# Altium PCB PCB1.PcbDoc
Units mil, origin at the board's own origin, x right, y up, seen from the top; angles counter-clockwise.
Board outline 5137.99 x 2720 mil, 2 copper layers (Top Layer, Bottom Layer); 60 components, 52 nets, 206 pads, 89 vias.
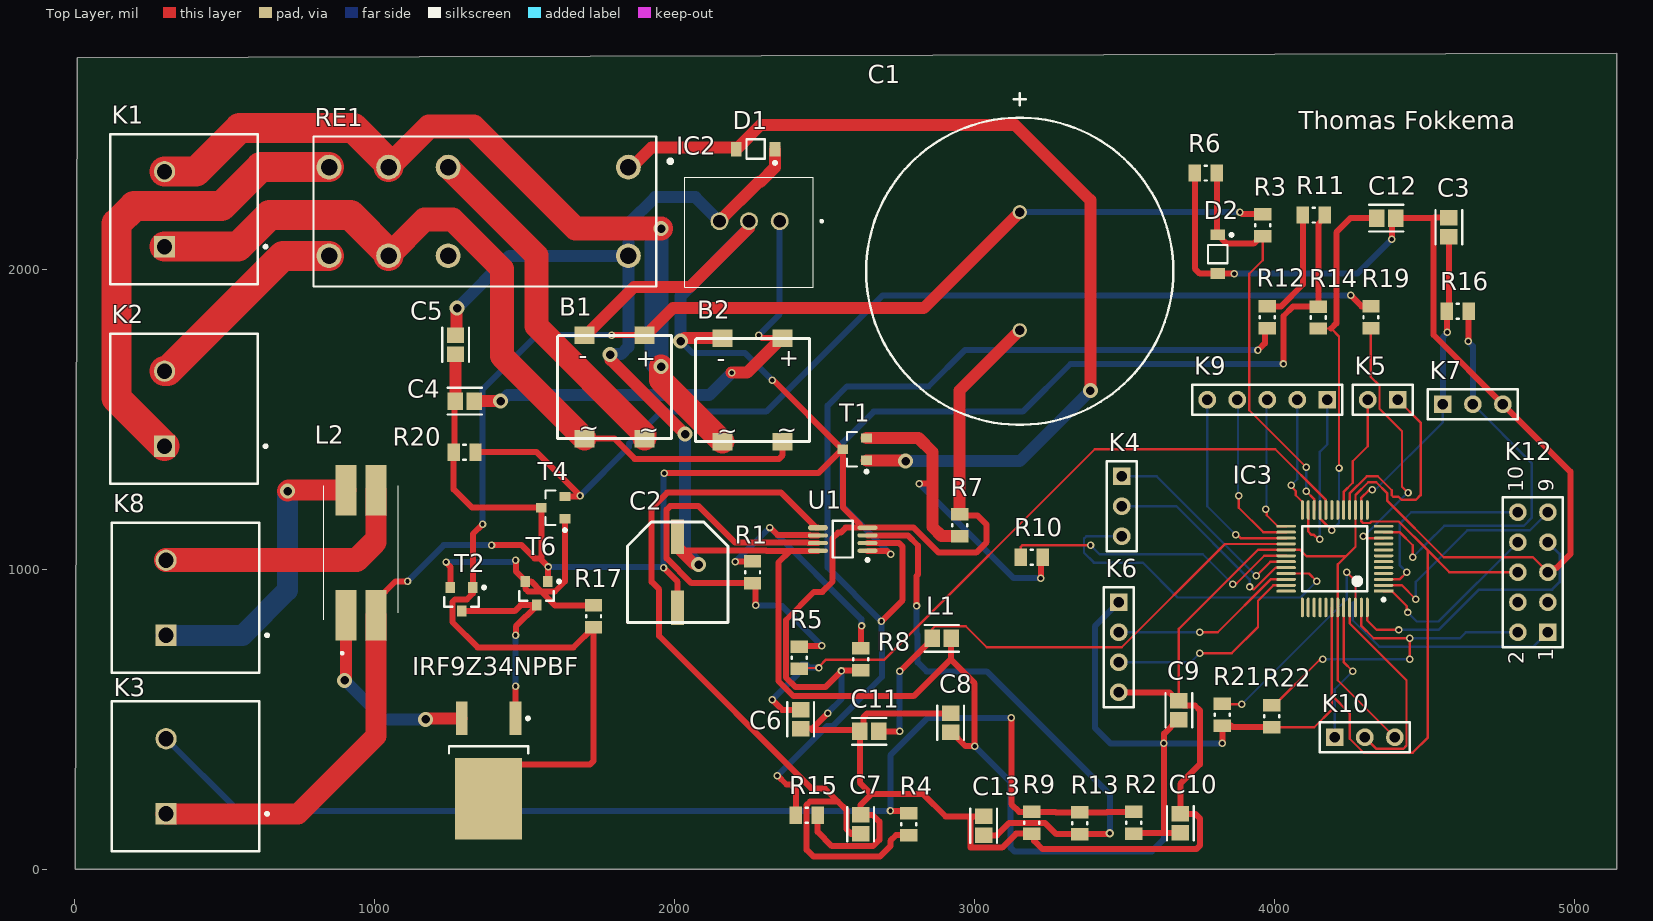
[diagram p0: Top Layer view]
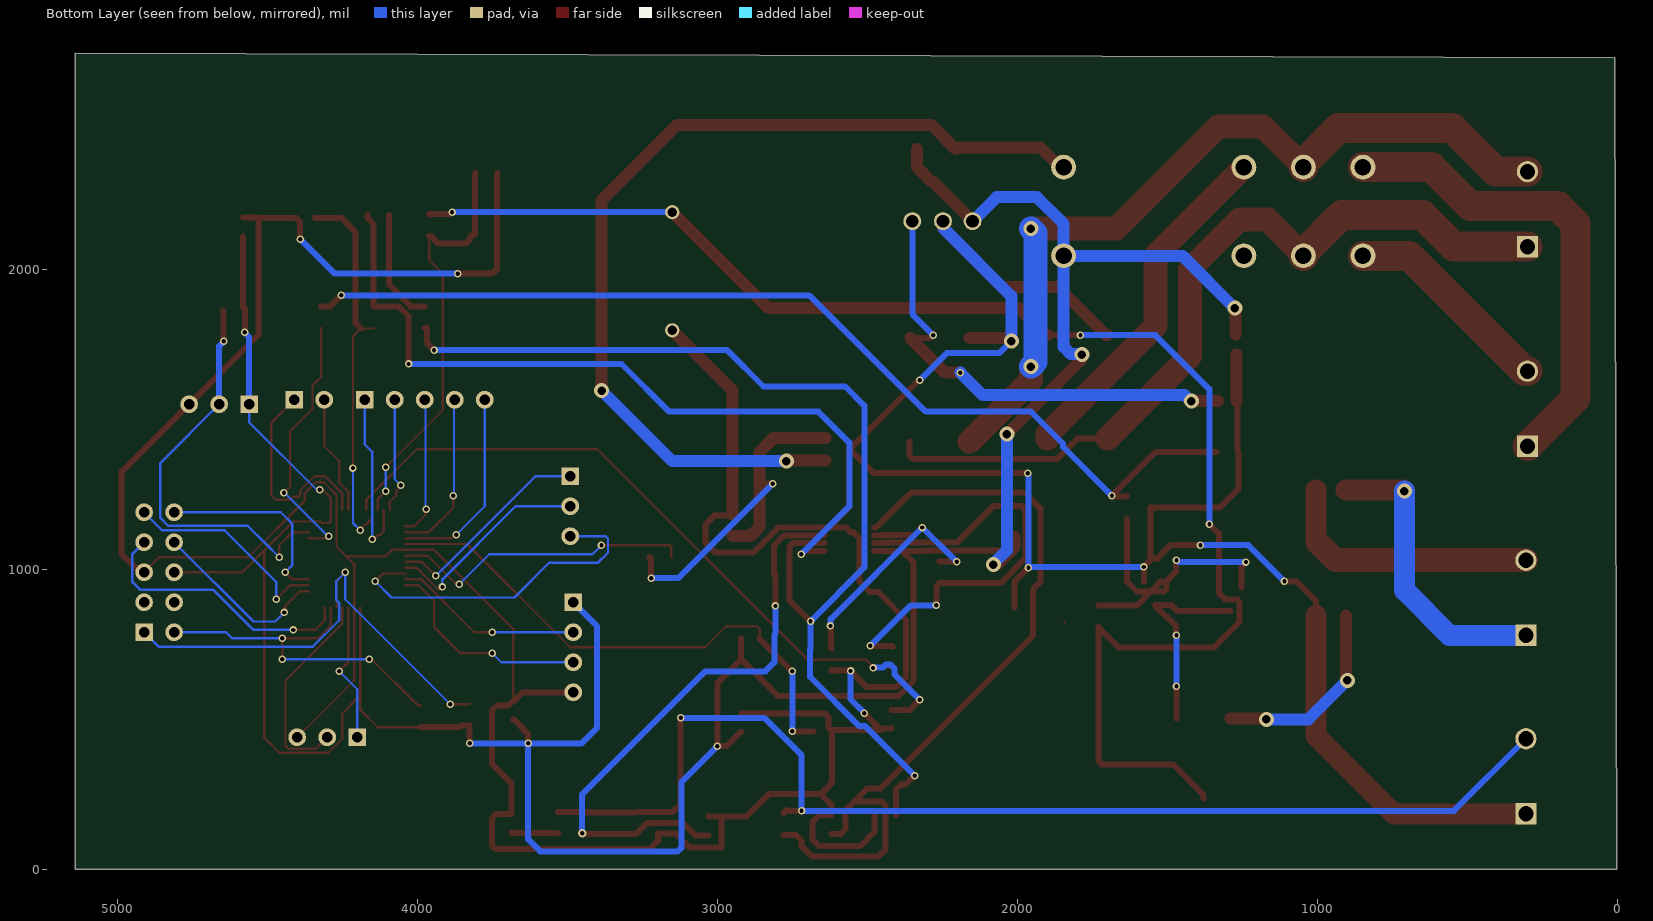
[diagram p1: Bottom Layer view, seen from below]

## Layer stack, top to bottom
Top Solder: solder mask 0.4, Solder Resist, Dk 3.5
Top Layer: signal copper 1.4
Dielectric 1: dielectric 12.6, FR-4, Dk 4.8
Bottom Layer: signal copper 1.4
Bottom Solder: solder mask 0.4, Solder Resist, Dk 3.5

## Board outline
2.01,0 5140,0 5140,2535 5140,2720 8.28,2705

## Design rules (kind name [scope] priority, off if disabled: settings)
Clearance [All] p1: gap=5 ignorepadtopadclearanceinfootprint=FALSE
MinimumSolderMaskSliver [All] p1: minsoldermaskwidth=6
PolygonConnect [All] p1: connectstyle=Relief reliefconductorwidth=10 reliefentries=4 polygonreliefangle="90 Angle" airgapwidth=10
RoutingVias [All] p1: holewidth=28 width=50 viastyle="Through Hole" minholewidth=14 minwidth=25 maxholewidth=28 maxwidth=50
SilkToSilkClearance [All] p1: silktosilkclearance=6
SilkToSolderMaskClearance [IsText] p1: minsilkscreentomaskgap=8 clearancetoexposedcopper=TRUE
SolderMaskExpansion [All] p1: expansion=4 istentingtop=FALSE
Width [All] p1: maxlimit=100 minlimit=8 preferedwidth=20
27 further rules are at their usual default settings.

## Classes and differential pairs
component class Voeding_bout: B1 B2 C1 C4 C5 D1 D2 IC2 K1 K2 R3 R6 RE1
component class thermokoppel: IRF9Z34NPBF K8 L2 R17 R20 T2 T4 T6
component class PWM_soldeerbout: C6 C7 C12 C13 K3 R1 R2 R4 R5 R8 R9 R11 R12 R13 R14 R15 U1
component class CPU: C2 C3 C8 C9 C10 C11 IC3 K4 K5 K6 K7 K9 K10 K12 L1 R7 R10 R16 R19 R21 R22 T1

## Components (designator, comment, footprint, x,y, rotation, side; value= is the part's Value field where it differs from the comment)
B1 "Bridge_Rectifier" ttf 1800,1605 r0 top
B2 "Bridge_Rectifier" ttf 2260,1595 r0 top
C1 "Capacitor" CE_D25_L25_plugin 3150,1796.3 r90 top
C2 "10µ , 50V" CE_D8_L10 2010,990 r90 top
C3 "100n" CC_0805_L 4580,2140 r90 top value="0.22 μF"
C4 "100uf" CC_0805_L 1300,1560 r180 top value="0.22 μF"
C5 "50uf" CC_0805_L 1270,1748.47 r270 top value="0.22 μF"
C6 "10nf" CC_0805_L 2420,500 r270 top value="0.22 μF"
C7 "10nf" CC_0805_L 2620,150 r90 top value="0.22 μF"
C8 "100n" CC_0805_L 2920,488.47 r90 top value="0.22 μF"
C9 "10µ, 50V" CC_0805_L 3680,530 r90 top value="0.22 μF"
C10 "100n" CC_0805_L 3685,153.47 r90 top value="0.22 μF"
C11 "100n" CC_0805_L 2648.47,460 r180 top value="0.22 μF"
C12 "10nf" CC_0805_L 4371.53,2170 r0 top value="0.22 μF"
C13 "10nf" CC_0805_L 3030,145 r90 top value="0.22 μF"
D1 "1N4007" SOD-123FL 2270,2400 r180 top value=15pF
D2 "Zener_Diode" SOD-123FL 3810,2050 r270 top
IC2 "OKI-78SR-5/1.5-W36-C" OKI78SR515W36C 2350,2160 r180 top
IC3 "ATMEGA4809" TQFP_48_M 4200,1035 r180 top
IRF9Z34NPBF "MOSFET_P" TO_252 1380,330 r270 top
K1 "O-Y" PHOE-1714955_V 300,2200 r90 top
K2 "R-B" PHOE-1714955_V 300,1535 r90 top
K3 "GND-T" PHOE-1714955_V 305,310 r90 top
K4 "Connector 3" HDR1X3 3490,1310 r270 top
K5 "Connector 2" HDR1X2 4410,1565 r180 top
K6 "Connector 4" HDR1X4 3480,890 r270 top
K7 "Connector 3" HDR1X3 4560,1550 r0 top
K8 "P-O" PHOE-1714955_V 305,905 r90 top
K9 "Connector 5" HDR1X5 4175,1565 r180 top
K10 "Connector 3" HDR1X3 4200,440 r0 top
K12 "Connecotr 10" HDR2X5 4910,790 r90 top
L1 "10µA" CC_0805_L 2890,770 r0 top
L2 "Common_Mode_Choke" 2545 955,1055 r0 top
R1 "18K" R_0805_M 2260,990 r90 top
R2 "1M" R_0805_M 3530,155 r270 top
R3 "68Kohm" R_0805_M 3960,2146.42 r270 top
R4 "5K6" R_0805_M 2780,150 r90 top
R5 "5K6" R_0805_M 2415,705 r90 top
R6 "10Kohm" R_0805_M 3770,2320 r0 top
R7 "4,7k" R_0805_M 2950,1146.42 r270 top
R8 "100E" R_0805_M 2620,700 r90 top
R9 "10M" R_0805_M 3190,155 r90 top
R10 "10k" R_0805_M 3190,1040 r0 top
R11 "18K" R_0805_M 4130,2180 r180 top
R12 "18K" R_0805_M 3975,1840 r270 top
R13 "5K6" R_0805_M 3350,153.58 r90 top
R14 "5K6" R_0805_M 4145,1838.58 r90 top
R15 "100E" R_0805_M 2440,180 r180 top
R16 "4,7k" R_0805_M 4610,1860 r180 top
R17 "4k7" R_0805_M 1730,843.58 r270 top
R19 "10K" R_0805_M 4320,1840 r270 top
R20 "4k7" R_0805_M 1300,1390 r0 top
R21 "4,7k" R_0805_M 3825,515 r270 top
R22 "4,7k" R_0805_M 3990,510 r270 top
RE1 "RELAY_GENERAL_PURPOSE" RT42 1845.79,2192.36 r180 top
T1 "Transistor_NPN" SOT_23 2600,1400 r180 top
T2 "BC547" SOT_23 1290,900 r270 top
T4 "BC547" SOT_23 1595,1205 r180 top
T6 "BC557" SOT_23 1540,920 r270 top
U1 "Dual_Opamp" MSOP_8_M 2560,1100 r180 top

## Footprints (in the part's own frame and the unit in brackets; to place one, negate y for a bottom-side part, rotate by r counter-clockwise, add the part's x,y. Pads: shape width x height; smd on the part's side, far side on the other; paste and mask are expansions set on the pad)
2545 [mm]
  rect 1.78x4.27 smd: 1(-1.27,-5.305) 2(1.27,-5.305) 3(1.27,5.305) 4(-1.27,5.305)
  silkscreen extent -3.15,-8.6 3.15,5.69, body extent -3.15,-7.26 3.15,7.26, height 9.6
CC_0805_L [mil]
  rect 51.36x57.33 smd paste+0 mask+0: 1(-31.53,0) 2(31.53,0)
  silkscreen extent -57,-44 57,44, body extent -67,-39 67,39, height 10
CE_D8_L10 [mm]
  rect 2.9x1.1 smd: 1(-3,0) 2(3,0)
  Top Layer lines w0.254: -4.259,4.25 -4.25,4.241
  silkscreen extent -4.26,-4.25 4.25,4.25
CE_D25_L25_plugin [mm]
  round 1.2 hole 0.8: 1(0,0) 2(10,0)
  silkscreen extent -8,-13 20.07,13
HDR1X2 [mm] "Connector; Header; 2 Position"
  rect 1.5x1.5 hole 0.9: 1(0,0)
  round 1.5 hole 0.9: 2(2.54,0)
  silkscreen extent -1.27,-1.27 3.81,1.27
HDR1X3 [mm] "Connector; Header; 3 Position"
  rect 1.5x1.5 hole 0.9: 1(0,0)
  round 1.5 hole 0.9: 2(2.54,0) 3(5.08,0)
  silkscreen extent -1.27,-1.27 6.35,1.27
HDR1X4 [mm] "Connector; Header; 4 Position"
  rect 1.5x1.5 hole 0.9: 1(0,0)
  round 1.5 hole 0.9: 2(2.54,0) 3(5.08,0) 4(7.62,0)
  silkscreen extent -1.27,-1.27 8.89,1.27
HDR1X5 [mm] "Connector; Header; 5 Position"
  rect 1.5x1.5 hole 0.9: 1(0,0)
  round 1.5 hole 0.9: 2(2.54,0) 3(5.08,0) 4(7.62,0) 5(10.16,0)
  silkscreen extent -1.27,-1.27 11.43,1.27
HDR2X5 [mm] "Connector; Header; 5x2 Position"
  rect 1.5x1.5 hole 0.9: 1(0,0)
  round 1.5 hole 0.9: 2(0,2.54) 3(2.54,0) 4(2.54,2.54) 5(5.08,0) 6(5.08,2.54) 7(7.62,0) 8(7.62,2.54) 9(10.16,0) 10(10.16,2.54)
  silkscreen extent -1.27,-1.27 11.43,3.81
MSOP_8_M [mm] "TSOP, 8-Leads, Body 3x3mm, Pitch 0.65mm, IPC Medium Density"
  oval 1.7x0.35 smd: 1(-2.1,0.975) 2(-2.1,0.325) 3(-2.1,-0.325) 4(-2.1,-0.975) 6(2.1,-0.325) 7(2.1,0.325) 8(2.1,0.975)
  oval 1.7x0.45 smd: 5(2.1,-0.975)
  silkscreen extent -2.22,-1.55 0.85,1.87, body extent -1.55,-1.55 1.55,1.55, height 1.1
OKI78SR515W36C [mm]
  round 1.519 hole 1.08: 1(0,0) 2(2.6,0) 3(5.1,0)
  silkscreen extent -3.6,-3.7 8.05,5.6, body extent -2.85,-3.7 8.05,5.6, height 16.6
PHOE-1714955_V [mm] "Terminal Block, 2-Leads, Body 12.7x12.5mm, Pitch 6.35mm"
  rect 1.8x1.8 hole 1.3: 1(-3.175,0)
  round 1.8 hole 1.3: 2(3.175,0)
  silkscreen extent -6.35,-8.68 6.35,4.6, body extent -6.92,-7.9 6.35,4.6, height 21.51
R_0805_M [mm] "Chip Resistor, 2-Leads, Body 2.00x1.25mm, IPC Medium Density"
  rect 1.05x1.45 smd: 1(-0.925,0) 2(0.925,0)
  silkscreen extent -0.1,-0.62 0.1,0.62, body extent -1.1,-0.72 1.1,0.72, height 0.5
RT42 [mm]
  round 2.1 hole 1.4: 11(20.3,3.75) 12(15.26,3.75) 14(25.34,3.75) 21(20.3,-3.75) 22(15.26,-3.75) 24(25.34,-3.75) A1(0,3.75) A2(0,-3.75)
  silkscreen extent -3.67,-6.35 26.65,6.35, body extent -2.21,-6.35 26.79,6.35, height 15.86
SOD-123FL [mm] "SOD, 2-Leads, Body 2.7x1.65mm"
  rect 0.91x1.22 smd: 1(-1.635,0) 2(1.635,0)
  silkscreen extent -1.76,-0.82 0.78,1.28, body extent -1.35,-0.82 1.35,0.82, height 1
SOT_23 [mm] "SOT23, 3-Leads, Body 2.92x1.3mm, Pitch 0.95mm"
  rect 0.9x0.8 smd: 1(-1,0.95) 2(-1,-0.95) 3(1,0)
  silkscreen extent -1.13,-1.46 0.65,2.02, body extent -0.65,-1.46 0.65,1.46, height 1.11
TO_252 [mm] "DPAK, 3-Leads, Body 6.5x6.12mm, Pitch 2.28mm, IPC Low Density"
  rect 2.85x1 smd: 1(-4.4,2.28) 3(-4.4,-2.28)
  rect 6.9x5.65 smd: 2(2.4,0)
  silkscreen extent -4.52,-3.35 -1.45,3.46, body extent -2.05,-3.32 4.17,3.32, height 2.35
TQFP_48_M [mm]
  rect 1.655x0.252 smd paste+0 mask+0: 1(-4.125,2.75)
  rrect100% 1.655x0.252 smd paste+0 mask+0: 2(-4.125,2.25) 3(-4.125,1.75) 4(-4.125,1.25) 5(-4.125,0.75) 6(-4.125,0.25) 7(-4.125,-0.25) 8(-4.125,-0.75) 9(-4.125,-1.25) 10(-4.125,-1.75) 11(-4.125,-2.25) 12(-4.125,-2.75) 25(4.125,-2.75) 26(4.125,-2.25) 27(4.125,-1.75) 28(4.125,-1.25) 29(4.125,-0.75) 30(4.125,-0.25) 31(4.125,0.25) 32(4.125,0.75) 33(4.125,1.25) 34(4.125,1.75) 35(4.125,2.25) 36(4.125,2.75)
  rrect100% 0.252x1.655 smd paste+0 mask+0: 13(-2.75,-4.125) 14(-2.25,-4.125) 15(-1.75,-4.125) 16(-1.25,-4.125) 17(-0.75,-4.125) 18(-0.25,-4.125) 19(0.25,-4.125) 20(0.75,-4.125) 21(1.25,-4.125) 22(1.75,-4.125) 23(2.25,-4.125) 24(2.75,-4.125) 37(2.75,4.125) 38(2.25,4.125) 39(1.75,4.125) 40(1.25,4.125) 41(0.75,4.125) 42(0.25,4.125) 43(-0.25,4.125) 44(-0.75,4.125) 45(-1.25,4.125) 46(-1.75,4.125) 47(-2.25,4.125) 48(-2.75,4.125)
  silkscreen extent -4.25,-2.75 2.75,3.58, body extent -5.2,-5.2 5.2,5.2, height 0.25
ttf [mm]
  rect 1.7x1.5 smd: 1(2.54,4.445) 2(-2.54,4.445) 3(-2.54,-4.318) 4(2.54,-4.318)
  silkscreen extent -4.83,-4.3 4.83,4.4

## Part data
B1 B2: Average Rectified Current-Max=0.8A, Forward Voltage=1V, Manufacturer="Diodes Inc", Package Description="4-Pin Small Outline Integrated Circuit, Body 4.7 x 3.8 mm, Pitch 2.5 mm", Package Reference=MiniDIP-4, Package Version=05/2016, Peak Current-Max=30A, Reverse Current-Max=5µA, Reverse Voltage-Max [Vrrm]=600V, Datasheet URL=http://www.diodes.com/_files/datasheets/ds17003.pdf, Datasheet Version="Rev. 13-2, 12/2010", Manufacturer URL=http://www.diodes.com/, Mounting Technology=SurfaceMount, Package URL=http://www.diodes.com/_files/packages/MiniDIP.pdf
C2: library part Capacitor_Electrolytic, Manufacturer=Panasonic, Max Operating Temperature="105 degC", Min Operating Temperature="-55 degC", Package Quantity=500, Voltage Rating="25 V", ComponentLink1Description="Manufacturer URL", ComponentLink1URL=http://www.panasonic.com/, ComponentLink2Description=Datasheet, ComponentLink2URL=http://industrial.panasonic.com/cdbs/www-data/pdf/RDE0000/ABA0000C1181.pdf, DatasheetVersion=03/2016, Height="10.2 mm", Lead Pitch="3.1 mm", Length="10.2 mm", Mount="Surface Mount", Mounting Technology="Surface Mount", PackageDescription="2-Pin Electrolytic Aluminum Capacitor, Body 8.3 x 8.3 mm", PackageReference=EEE-FK1E221P, Packaging="Tape and Reel", Pins=2, REACH SVHC="No SVHC", RoHSCompliant=true
C3 C4 C5 C6 C7 C8 C9 C10 C11 C12 C13: library part Capacitor_Ceramic, Capacitance="0.22 μF", Manufacturer=KEMET, Manufacturer Part Number=C0805C224K5RACTU, Package=C0805C-DN, Temperature="-55°C to +125°C", Temperature Characteristic=X7R, Temperature Coefficient=30ppm/°C, Temperature Range High=+125°C, Temperature Range Low=-55°C, Tolerance=0.1, Voltage Rating="50 V", Automotive=No, Category=Cap, ComponentLink2Description=Datasheet, ComponentLink2URL=https://content.kemet.com/datasheets/KEM_C1003_C0G_SMD.pdf, Device Class L1="Passive Components", Device Class L2=Capacitors, Device Class L3="Ceramic Capacitors", Digikey Description="CAP CER 0.22UF 50V X7R 0805", Height=0.88mm, Ipc Land Pattern Name=CAPC200125X78, Lead Free=Yes, Material=Ceramic, Mouser Description="CAP CER 0.22UF 50V X7R 0805", Octopart=https://octopart.com/c0805c224k5ractu-kemet-144670, RoHS=TRUE
D1: library part Diode, Capacitance=15pF, Forward Current=1A, Manufacturer=Diotec, Max Junction Temp=+175°C, Max Repetitive Reverse Voltage=1000V, Max Surge Forward Current=27A, Peak Reverse Current=5uA, Temperature="-50°C to +175°C", Temperature Range Low=-50°C, Automotive=No, Category=Diode, ComponentLink2Description=Datasheet, ComponentLink2URL=https://datasheet.octopart.com/1N4007-Diotec-datasheet-62346875.pdf, Device Class L1="Discrete Semiconductors", Device Class L2=Diodes, Device Class L3="Rectifier Diodes", Height=2.8mm, Ipc Land Pattern Name=DIOAD888W100L520D280, Lead Free=Yes, Manufacturer Part Number=1N4007, Octopart=https://octopart.com/1n4007-diotec-4040411, Package=1N4007, Reverse Voltage=1000V, RoHS=TRUE, Temperature Range High=+175°C
D2: Manufacturer="On Semiconductor", PartNumber=1SMB5920BT3G, ComponentLink1Description="Manufacturer URL", ComponentLink1URL=http://www.onsemi.com/, ComponentLink2Description=Datasheet, ComponentLink2URL=http://www.onsemi.com/pub_link/Collateral/1SMB5913BT3-D.PDF, ComponentLink3Description="Package Specification", ComponentLink3URL=http://www.onsemi.com/pub_link/Collateral/1SMB5913BT3-D.PDF, DatasheetVersion="Rev. 8", Mounting Technology="Surface Mount", PackageDescription="2-Pin Small Molded Package, J-Bend Lead, Body 4.33 x 3.625 mm", PackageReference=SMB-2-403A-03_H, PackageVersion="Rev. H, 05/2011", Packing="Tape and Reel", RoHS=Pb-Free, VZ Typ (V)=6.2
IC2: "Non-Isolated DC/DC Converter, 7.5 W, 7 to 36 V, 1.5 A, -40 to 85 degC, 3-Pin THD, RoHS", Current - Output (Max)=1.5A, Manufacturer=Murata, Operating Temperature=-40degC~85degC, Package / Case=3-SIPModule, Power (Watts) - Manufacture Series=8W, Voltage - Input (Max)=36V, Voltage - Input (Min)=7V, Voltage - Isolation=-, Voltage - Output 1=5V, Applications=ITE(Commercial), Category=PowerSupplies-BoardMount, Datasheet URL=https://datasheet.ciiva.com/8006/1790439-8006672.pdf, Datasheet Version=Oct-13, Efficiency=90.5%, Family=DCDCConverters, Features=SCP, Manufacturer URL=http://www.murata.com/, Mounting Type=ThroughHole, Number of Outputs=1, Packaging=Tube, Power (Watts) - Max=8W, Series=Okami™OKI-78SR, Size / Dimension="0.41\"Lx0.30\"Wx0.65\"H(10.4mmx7.6mmx16.5mm)", Type=LinearRegulatorReplacement, Voltage - Output 2=-, Voltage - Output 3=-
IC3: Case/Package=TQFP, Max Operating Temperature=85°C, Min Operating Temperature=-40°C, Core Architecture=AVR, Interface=I2C, Memory Size=48KB, Memory Type=FLASH, Mount="Surface Mount", Number of I/Os=41, Oscillator Type=Internal, Peripherals="Brown-out Detect/Reset", RoHS Compliant=Yes, Series="megaAVR® 0, Functional Safety (FuSa)"
IRF9Z34NPBF: Continuous Drain Current Id=2.4A, Current Temperature=25°C, Drain Source Voltage Vds=20V, Manufacturer="Fairchild Semiconductor", On Resistance Rds(on)=52mohm, Operating Temperature Max=150°C, Operating Temperature Min=-55°C, Operating Temperature Range=-55°Cto+150°C, Package / Case=SOT-23, Package Description="3-Pin Small Outline Transistor, Body 2.92 x 1.4 mm, Pitch 0.95 mm", Package Reference=SSOT3L, Package Version="Rev. 3, 05/2015", Power Dissipation Pd=500mW, Pulse Current Idm=10A, Rds(on) Test Voltage Vgs=-4.5V, Threshold Voltage Vgs Typ=-800mV, Voltage Vds Typ=-20V, Voltage Vgs th Max=-1.5V, Current Id Max=2.4A, Datasheet URL=https://www.fairchildsemi.com/datasheets/FD/FDN304P.pdf, Datasheet Version="Rev. C, 01/2001", External Depth=2.5mm, External Length / Height=1.12mm, External Width=3.05mm, Full Power Rating Temperature=25°C, Manufacturer URL=https://www.fairchildsemi.com/, Mounting Technology=SurfaceMount, No. of Pins=3, Package URL=https://www.fairchildsemi.com/package-drawings/MA/MA03B.pdf, Reel Quantity=3000, SMD Marking=304P, SVHC=NoSVHC(19-Dec-2012), Tape Width=8mm, Termination Type=SMD, Transistor Case Style=SOT-23, Transistor Polarity=PChannel, Voltage Vds=20V, Voltage Vgs Max=-800mV, Voltage Vgs Rds on Measurement=-4.5V
K1 K2 K3 K8: library part CMP-2000-05797-1, "PC Terminal Block, Pitch 6.35 mm, 1 x 2 Position, Height 21.5 mm, Tail Lenght 5.1 mm, RoHS, Bulk", Manufacturer="Phoenix Contact", Package Description="PC Terminal Block, Pitch 6.35 mm, 1 x 2 Position, Height 21.5 mm, Tail Lenght 5.1 mm", Package Reference=1714955, Datasheet URL=http://media.digikey.com/pdf/Data%20Sheets/Phoenix%20Contact%20PDFs/1714955.pdf, Datasheet Version=02/2010, Manufacturer URL=http://www.phoenixcontact.com/, Mounting Technology=ThroughHole
L1: library part Choke, Case/Package=1350, Current Rating=8.5A, DC Resistance (DCR)=14.1mR, Inductance=10uH, Inductance Tolerance=20%, Max Operating Temperature=155°C, Min Operating Temperature=-40°C, Package Quantity=1, Ratings=AEC-Q200, Resistor Type=Wirewound, Saturation Current=10A, Self Resonant Frequency=18MHz, Series Resistance=14.1R, Test Frequency=100kHz, Height=4.7mm, Height - Seated (Max)=0.197inch, Length=0.512inch, Max DC Current=8.5A, Mount="Surface Mount", Packaging="Tape and Reel", RMS Current (Irms)=8.5A, RoHS Compliant=Yes, Series=WE-HCI, Shielding=Shielded, Termination=SMD/SMT, Tolerance=20%, Width=12.8mm
L2: Case/Package=1808, Current=2A, Current Rating=2.3A, DC Resistance (DCR)=60mR, Insulation Resistance=10MR, Max Operating Temperature=85°C, Max Voltage Rating (DC)=50V, Min Operating Temperature=-40°C, Package Quantity=1, Test Frequency=100MHz, DC Current=2A, DC Resistance-Max=60mR, Depth=4.7mm, Element Configuration=Dual, Height=2mm, Impedance=900R, Lead Free="Lead Free", Length=0.185inch, Max Current Rating=2A, Max DC Current=2A, Mount="Surface Mount", Number of Lines=2, Number of Pins=4, Packaging="Tape and Reel", Radiation Hardening=No, REACH SVHC="No SVHC", RoHS Compliant=Yes, Series=ACM, Termination=Flat, Voltage Rating=50V, Voltage Rating (DC)=50V, Width=4.5mm
R1 R2 R3 R4 R5 R6 R7 R8 R9 R10 R11 R12 R13 R14 R15 R16 R17 R19 R20 R21 R22: library part Resistor, Manufacturer="Vishay Dale", Part Number=CRCW08050000Z0EA
RE1: Ambient Temperature Range High=+85°C, Ambient Temperature Range Low=-40°C, Coil Power=403mW, Coil Resistance=62Ω, Coil Voltage=5V, Current Rating=8A, Manufacturer="TE Connectivity", Manufacturer Part Number=RT424005, Automotive=No, Category=Relay, Coil Type=Non-Latching, ComponentLink2Description=Datasheet, ComponentLink2URL=https://www.te.com/commerce/DocumentDelivery/DDEController?Action=showdoc&DocId=Data+Sheet%7FRT2%7F1014%7Fpdf%7FEnglish%7FENG_DS_RT2_1014.pdf%7F5-1393243-9, Device Class L1=Electromechanical, Device Class L2=Relays, Device Class L3="Power Relays", Digikey Description="RELAY GENERAL PURPOSE DPDT 8A 5V", Height=15.7mm, Lead Free=Yes, Mouser Description="General Purpose Relay, Rt2 Series, Power, Non Latching, Dpdt, 5 Vdc, 8 A Rohs Compliant: Yes", Number Of Contacts=2, Octopart=https://octopart.com/5-1393243-9-te+connectivity-41835766, Package=RT424005, RoHS=TRUE, Throw Configuration=DPDT
T1: Manufacturer="On Semiconductor", PartNumber=BC547C, ComponentLink1Description="Manufacturer URL", ComponentLink1URL=http://www.onsemi.com/, ComponentLink2Description=Datasheet, ComponentLink2URL=http://www.onsemi.com/pub_link/Collateral/BC546-D.PDF, ComponentLink3Description="Package Specification", ComponentLink3URL=http://www.onsemi.cn/pub_link/Collateral/2N6426-D.PDF, DatasheetVersion="Rev. 7", fT Min (MHz)=150, IC Continuous (A)=0.1, Mounting Technology="Through Hole", PackageDescription="3-Pin Transistor Outline, Body 4.825 x 3.685 mm, Pitch 1.27 mm", PackageReference=TO-92-3-29-11_AM_SL, PackageVersion="Rev. AM", Packing="Bulk Box", Polarity=NPN, RoHS=FALSE
T2 T4: library part Transistor_NPN, Manufacturer="On Semiconductor", PartNumber=BC547C, ComponentLink1Description="Manufacturer URL", ComponentLink1URL=http://www.onsemi.com/, ComponentLink2Description=Datasheet, ComponentLink2URL=http://www.onsemi.com/pub_link/Collateral/BC546-D.PDF, ComponentLink3Description="Package Specification", ComponentLink3URL=http://www.onsemi.cn/pub_link/Collateral/2N6426-D.PDF, DatasheetVersion="Rev. 7", fT Min (MHz)=150, IC Continuous (A)=0.1, Mounting Technology="Through Hole", PackageDescription="3-Pin Transistor Outline, Body 4.825 x 3.685 mm, Pitch 1.27 mm", PackageReference=TO-92-3-29-11_AM_SL, PackageVersion="Rev. AM", Packing="Bulk Box", Polarity=NPN, RoHS=FALSE
T6: library part Transistor_PNP, Manufacturer="On Semiconductor", PartNumber=BC557C, ComponentLink1Description="Manufacturer URL", ComponentLink1URL=http://www.onsemi.com/, ComponentLink2Description=Datasheet, ComponentLink2URL=http://www.onsemi.com/pub_link/Collateral/BC556B-D.PDF, ComponentLink3Description="Package Specification", ComponentLink3URL=http://www.onsemi.cn/pub_link/Collateral/2N6426-D.PDF, DatasheetVersion="Rev. 3", IC Continuous (A)=-0.1, Mounting Technology="Through Hole", PackageDescription="3-Pin Transistor Outline, Body 4.825 x 3.685 mm, Pitch 1.27 mm", PackageReference=TO-92-3-29-11_AM_SL, PackageVersion="Rev. AM", Packing="Bulk Box", Polarity=PNP, RoHS=FALSE
U1: Case/Package=PDIP, Input Bias Current=1pA, Input Offset Voltage (Vos)=4.5mV, Max Operating Temperature=125°C, Max Supply Voltage=6V, Min Operating Temperature=-40°C, Min Supply Voltage=1.8V, Nominal Supply Current=100uA, Operating Supply Voltage=5.5V, Output Current=23mA, Package Quantity=60, Power Supply Rejection Ratio (PSRR)=86dB, Voltage Gain=112dB, Amplifier Type="GENERAL PURPOSE", Bandwidth=1MHz, Common Mode Rejection Ratio=60dB, Gain Bandwidth Product=1MHz, Height=3.3mm, Input Offset Voltage-Max=4.5mV, Lead Free="Lead Free", Length=9.27mm, Mount="Through Hole", Number of Amplifiers=2, Number of Channels=2, Number Of Circuits=2, Number of Elements=2, Number of Pins=8, Operating Supply Current=100uA, Output Current per Channel=23mA, Packaging=Rail/Tube, Radiation Hardening=No, REACH SVHC="No SVHC", RoHS Compliant=Yes, Slew Rate=0.6V/µs, Slew Rate-Nom=0.6V/µs, Supply Current=100uA, Technology=CMOS, Unity Gain Bandwidth Product=1MHz, Width=6.35mm

## Via types
v1: diameter 25, hole 14, Top Layer to Bottom Layer, 75 vias
v2: diameter 50, hole 28, Top Layer to Bottom Layer, 13 vias
v3: diameter 28, hole 14, Top Layer to Bottom Layer, 1 vias

## Nets (pads, with @x,y where several pads share a name; then routed paths per layer and width w, separated by ;. In a path a pad name is that pad's centre, name@x,y a point inside that pad or via, vN(x,y) a via of type N, cw(c..) or ccw(c..) an arc to the next point about the centre after c; other vN are vias at no path point)
4: B1.2 B2.2 C1.1 C2.1 C3.2 C4.2 C5.2 C6.2 C7.2 C8.2 C9.2 C10.2 C11.2 C12.2 C13.2 D2.2 IC2.2 IC3.15 IC3.29 IC3.43 K3.1 K6.4 K7.3 K10.3 K12.5 L2.2 R6.1 R7.1 R8.1 R9.1 R15.1 R20.1 T1.3 T4.3 T6.1 U1.4 | length 18013.1
  Top Layer w8: C9.2 3680,801.05 3943.95,1065 4081.76,1065 4082.23,1064.53 ; IC3.29 4082.23,1064.53 ; K10.3 4209.84,630.16 IC3.43 4209.84,1016 4237.28,1043.43 ; K12.5 4860,1040 4562.91,1040 4374.12,1228.79 4374.12,1253.88 4338,1290 4311.29,1290 4268.9,1247.61 4268.9,1075.06 4237.28,1043.43 ; 4082.23,1064.53 4084.99,1064.53 4106.09,1043.43 4237.28,1043.43
  Top Layer w20: L2.2 1005,895.16 1068.89,959.04 1109.04,959.04 v1(1110,960) ; C4.2@1269.24,1560.76 C4.2 1266.03,1557.55 1266.03,1392.45 R20.1 1263.58,1266.42 1325,1205 T4.3 1555.63,1031.92 1578.6,1008.95 v1(1578.6,1007.6) 1578,1007 1578,959.97 T6.1 ; C5.2@1269.24,1716.18 C5.2 ; v1(1390,1080) 1490,1080 1533.38,1036.62 1549.02,1036.62 ; v1(1963,1005) 2010,958 C2.1 ; v1(1965,1320) 2478.66,1320 T1.3@2558.66,1400 ; v1(2325,1630) 2325.96,1629.04 2329.62,1629.04 T1.3@2558.66,1400 ; C6.2 2458.47,468.47 v1@2509.04,519.04 ; 2458.47,464.24 2612.71,464.24 C11.2 ; R15.1 2476.42,124.58 2524,77 2661,77 2682,98 2682,159 2659.47,181.53 C7.2 2620,215 2655.5,250.5 ; R8.1 2618.38,661.96 2556.96,661.96 2503,608 2402,608 2371,639 2371,831 2464.5,924.5 2492,924.5 2526,958.5 2526,1103 2545.12,1122.12 2553.73,1122.12 2570,1138.39 U1.4@2618,1138.39 ; C8.2 2641.72,520 2630,508.28 2630,473.05 C11.2 ; R7.1 2953.1,1179.74 3008.54,1179.74 3040,1148.28 3040,1090 3005,1055 2880,1055 2796.61,1138.39 U1.4 U1.4@2618,1138.39 ; C13.2 2995.53,176.53 ; K6.4 3648.54,590 3677.02,561.53 C9.2 3695.68,545.84 3734.16,545.84 3750,530 3750,350 3685,285 C10.2 3735,185 3750,170 3750,78.72 3738.28,67 3226,67 3198,95 3198,118.58 R9.1 3138,118.58 3091.42,72 2986,72 2986,167 2995.53,176.53 ; R6.1 3733.58,2001.72 3750.3,1985 3809.37,1985 D2.2 3810.31,1985.31 3864.69,1985.31 v1(3865,1985) ; v1(4390,2100) 4390.96,2100.96 4390.96,2157.9 C12.2 4529,2170 ; C3.2 4530.53,2171.53 4529,2170 ; K12.5 4920.57,990 4935.16,1004.59 4939.59,1004.59 4985,1050 4985,1325 K7.3 4529,1781 4529,2170 ; T1.3@2558.66,1400 T1.3 2560.63,1206 2618,1148.63 U1.4@2618,1138.39 ; C11.2 2616.95,289.05 2655.5,250.5 ; 2655.5,250.5 2828.5,250.5 2902.47,176.53 2995.53,176.53
  Top Layer w40: C4.2@1269.24,1560.76 C5.2@1269.24,1716.18 ; B1.2 1703.94,1780 1863.94,1940 2050,1940 IC2.2@2246.93,2136.93 ; v2(2020,1760) 2022.71,1760 2032.71,1770 B2.2 ; R7.1 2950,1596.3 C1.1
  Top Layer w70: K3.1 745,185 1005,445 L2.2
  Bottom Layer w20: v1(1110,960) 1230,1080 v1(1390,1080) ; v1(1578.6,1007.6) 1959.05,1007.6 1961.65,1005 v1(1963,1005) 1963,1316.65 1965,1318.65 v1(1965,1320) ; v2(2020,1760) 2060,1720 2235,1720 v1(2325,1630) ; v1(2510,520) 2510,521.35 2556,567.35 v1(2556,661) ; v1(3865,1985) 4275,1985 v1(4390,2100)
  Bottom Layer w40: v2(2020,1760) 2020,1910 2243.85,2133.85 2243.85,2156.21 IC2.2
8: C2.2 C3.1 C5.1 C8.1 C9.1 C10.1 D1.1 IC2.3 IC3.14 IC3.42 K6.1 K7.1 K12.6 L1.2 R2.2 R16.2 R21.2 R22.2 RE1.A1 U1.8 | length 11165.7
  Top Layer w8: R22.2 4131.58,473.58 4190.16,532.16 4190.16,578.84 ; IC3.42 4190.16,578.84 ; v1(4325,1265) 4321.75,1261.75 4311.75,1261.75 4288.58,1238.58 4288.58,1159 4293.58,1154 4317,1154 4322,1159 4413,1159 4510,1062 ; K12.6 4582,990 4510,1062 ; 4190.16,578.84 4250,519 4250,435 4296.53,388.47 4459.48,388.47 4510,439 4510,1062
  Top Layer w20: C5.1 C5.1@1272.5,1782.5 ; v2@1272.5,1867.5 v2(1275,1870) ; C2.2@2019.68,1063 2304,1063 2305.39,1061.61 2384.61,1061.61 ; U1.8 2384.61,1061.61 ; C8.1 2922.98,456.95 2968.97,410.96 2999.04,410.96 v1(3000,410) 3000,620 2921.53,698.47 2921.53,702 ; L1.2 2921.53,702 ; R2.2 3531.68,120.26 3630,120.26 ; C9.1 3677.02,498.47 3630.96,452.41 3630.96,420.96 v1(3630,420) 3630,120.26 ; C10.1 3683.32,120.26 3630,120.26 ; v1(3825,420) R21.2 3854,478.58 3859,473.58 R22.2 ; v1(4575,1790) 4574.29,1790.71 4574.29,1859.29 R16.2 4573.58,1868 4580,1874.42 C3.1 ; 2384.61,1061.61 2346,1023 2346,627 2396,577 2796.53,577 2921.53,702
  Top Layer w40: C5.1@1272.5,1782.5 v2@1272.5,1867.5 ; v2(1785,1715) 1786.91,1713.09 1786.91,1698.09 v2(2035,1450) ; C2.2 2010,1072.68 2019.68,1063 2065.76,1016.91 2078.09,1016.91 v2(2080,1015) ; IC2.3 2279.21,2290 2285,2290 2334.37,2339.37 D1.1
  Bottom Layer w8: v1(4325,1265) 4326.75,1263.25 4333.25,1263.25 4560,1490 K7.1
  Bottom Layer w20: v1(3000,410) 3120,290 3120,71.72 3131.72,60 3590,60 3630,100 v1(3630,420) v1(3825,420) ; K6.1 3400,810 3400,471.72 3451.72,420 v1@3628.65,420 ; K7.1 4560,1773.65 4575,1788.65 v1(4575,1790)
  Bottom Layer w40: v2(1275,1870) 1449.72,2044.72 RE1.A1 ; v2(1785,1715) 1786.91,1716.91 1821.42,1716.91 1845.79,1741.28 RE1.A1 ; v2(2035,1450) 2035,1062.71 2080,1017.71 v2(2080,1015) ; IC2.3 2069.21,2240 1935,2240 1845.79,2150.79 RE1.A1
CPU/PD0: C6.1 IC3.20 R5.1 | length 2494.8
  Top Layer w8: R5.1 2417.42,671 v1(2481,671) 2481,675.6 2495.57,690.17 2495.57,690.92 2502.65,698 2698,698 3400,1400 4001.47,1400 4170.47,1231 IC3.20
  Top Layer w20: v1(2325,565) 2358.47,531.53 C6.1
  Bottom Layer w20: v1(2325,565) 2409.04,649.04 2409.04,669.04 2422,682 2438.57,682 2448.61,671.96 2480.04,671.96 v1(2481,671)
CPU/PD1: C12.1 IC3.21 R14.1 | length 1301.9
  Top Layer w8: R14.1 4188,1802.16 4214,1776.16 v1(4214,1337) ; IC3.21 4150.79,1169.51 4190,1130.3 v1(4190,1130)
  Top Layer w20: 4188,1802.16 4205,1819.16 4205,2123 4252,2170 C12.1
  Bottom Layer w8: v1(4190,1130) 4214,1154 v1(4214,1337)
CPU/PD2: D2.1 IC3.22 R3.2 R6.2 | length 1405.5
  Top Layer w8: R3.2 3960,2030 3915,1985 3915,1530 v1(4105,1340) ; v1(4105,1260) 4131.1,1233.9 IC3.22
  Top Layer w20: R6.2 3808.21,2318.21 3808.21,2116.16 D2.1 3816.1,2114.37 3824.02,2106.46 3824.02,2100.35 3839.37,2085 3929.74,2085 3941.46,2096.72 3941.46,2099.33 3952.13,2110 R3.2
  Bottom Layer w8: v1(4105,1260) v1(4105,1340)
CPU/R19: R19.1 R20.2 T4.2 | length 3393.4
  Top Layer w20: R20.2 1540,1390 v1(1685,1245) 1683.65,1245 1681.05,1242.4 T4.2 ; v1(4253,1913) 4289.58,1876.42 R19.1
  Bottom Layer w20: v1(1685,1245) 1847.66,1407.66 1847.66,1418.29 1954.37,1525 2305,1525 2693,1913 v1(4253,1913)
NetB1_3: B1.3 B2.4 K1.1 RE1.11 | length 2764.4
  Top Layer w20: B1.3 1800,1435 1867,1368 2348,1368 2360,1380 B2.4
  Top Layer w80: RE1.11 1166.85,2165 1260,2165 1425,2000 1425,1710 B1.3
  Top Layer w100: K1.1 545,2075 650,2180 920,2180 1046.57,2053.43 RE1.11
NetB1_4: B1.4 RE1.22 | length 1176.3
  Top Layer w80: RE1.22 1540,2045 1540,1810 1900,1450 B1.4
NetB2_1: B2.1 C4.1 IC2.1 | length 1604.7
  Top Layer w20: v1(2280,1780) 2281.35,1780 2291.35,1770 2356.06,1770 B2.1
  Top Layer w40: C4.1 v2(1420,1560) ; v1(2190,1655) 2241.06,1655 B2.1@2356.06,1770
  Bottom Layer w20: v1(2280,1780) 2350,1850 IC2.1
  Bottom Layer w40: v2(1420,1560) 1422.71,1560 1442.71,1580 2115,1580 v1(2190,1655)
NetB2_3: B2.3 K1.2 RE1.21 | length 2780.9
  Top Layer w80: RE1.21 1181.57,2475 1330,2475 1670,2135 v2(1955,2135) ; v2(1955,1675) 1955,1630 B2.3
  Top Layer w100: K1.2 405,2325 550,2470 930,2470 1046.57,2353.43 RE1.21
  Bottom Layer w80: v2(1955,1675) 1940,1690 1940,2120 v2(1955,2135)
NetC7_1: C7.1 R4.1 U1.5 | length 2689.9
  Top Layer w20: U1.5 2471.37,1138.39 2354.75,1255 1975,1255 1923.34,1203.34 1923.34,957.95 1948.34,932.95 1948.34,777.66 2457,269 2501,269 2544,226 ; C7.1 2588,118.47 2572,134.47 2572,198 2544,226 ; R4.1 2737.58,113.58 2719,95 2719,77 2684,42 2463,42 2440,65 2440,215 2451,226 2544,226
NetC11_1: C11.1 IC3.28 L1.1 | length 1810.9
  Top Layer w8: L1.1 2858.47,800.47 2868,810 2970,810 3040,740 3489.79,740 3834,1084.21 IC3.28
  Top Layer w20: C11.1 v1(2750,460) ; v1(2750,660) 2750.96,660.96 2752.41,660.96 2858.47,767.02 L1.1
  Bottom Layer w20: v1(2750,460) v1(2750,660)
NetC13_1: C13.1 R13.1 U1.3 | length 1982.1
  Top Layer w20: U1.3 2777.2,1112.8 2811,1079 2811,981.68 2806,976.68 v1(2806,878) ; C13.1 3073.47,113.47 3074,114 ; 3073.47,114.53 3074,114 ; v3(3450,120) 3447.84,120 3445,117.17 R13.1 3271.83,117.17 3234,155 3115,155 3074,114
  Bottom Layer w20: v1(2806,878) 2806,785.82 2810,781.82 2810,690 2840,660 3040,660 3450,250 v3(3450,120)
NetD1_2: D1.2 RE1.A2 T1.1 | length 3184.3
  Top Layer w40: RE1.A2 1857.34,2340 1922.34,2405 2200.63,2405 2201.61,2404.02 2203.54,2404.02 D1.2@2205.63,2401.93 ; D1.2 D1.2@2205.63,2401.93 ; T1.1 2684.7,1362.6 2685.38,1361.91 2768.09,1361.91 v2(2770,1360) ; v2(3385,1595) 3385,2230 3135,2480 2285.63,2480 2209.65,2404.02 2207.72,2404.02 D1.2@2205.63,2401.93
  Bottom Layer w40: v2(2770,1360) 3150,1360 v2(3385,1595)
NetIC3_1: IC3.1 K12.8 | length 609.1
  Top Layer w8: IC3.1 4390.03,926.73 4439.75,877.02 4439.75,859.25 v1(4443,856)
  Bottom Layer w8: v1(4443,856) 4473,826 4546,826 K12.8
NetIC3_2: IC3.2 K12.9 | length 720.9
  Top Layer w8: IC3.2 4423.58,946.42 v1(4470,900)
  Bottom Layer w8: v1(4470,900) 4470,958 4642,1130 4850,1130 K12.9
NetIC3_3: IC3.3 K12.10 | length 668.6
  Top Layer w8: IC3.3 4416.1,966.1 v1(4440,990)
  Bottom Layer w8: v1(4440,990) 4416,1014 4416,1151 4455,1190 K12.10
NetIC3_10: IC3.10 R19.2 | length 879.1
  Top Layer w8: v1(4295,1110) 4299.6,1110 4305.7,1103.9 IC3.10 ; R19.2 4320,1641 4349,1612 4349,1535 4424,1460 4424,1274.79 v1(4444,1254.79)
  Bottom Layer w8: v1(4295,1110) 4297.1,1110 4441.9,1254.79 v1(4444,1254.79)
NetIC3_11: IC3.11 K7.2 R16.1 | length 1382.9
  Top Layer w8: IC3.11 4362.79,1123.21 4391.78,1123.21 4392.04,1122.95 4417.05,1122.95 4460,1080 v1(4460,1040)
  Top Layer w20: v1(4645,1760) 4645.71,1760.71 4645.71,1859.29 R16.1
  Bottom Layer w8: v1(4460,1040) 4507.36,1087.36 4565,1145 4830,1145 4856,1171 4856,1354 K7.2
  Bottom Layer w20: v1(4645,1760) 4645,1758.65 4660,1743.65 K7.2
NetIC3_16: IC3.16 K5.1 | length 713.8
  Top Layer w8: IC3.16 4249.21,1252.21 4307,1310 4343,1310 4390,1263 4390,1246.79 4395,1241.79 4412.21,1241.79 4423,1231 4470,1231 4486,1247 4486,1489 K5.1
NetIC3_17: IC3.17 K5.2 | length 400.9
  Top Layer w8: IC3.17 4229.53,1257.53 4260,1288 4260,1360 4310,1410 K5.2
NetIC3_23: IC3.23 K9.1 | length 596.1
  Top Layer w8: IC3.23 4111.42,1126 4122.79,1114.63 4130.77,1114.63 4145.4,1100 v1(4150,1100)
  Bottom Layer w8: v1(4150,1100) 4150,1391 4175,1416 K9.1
NetIC3_24: IC3.24 K9.2 | length 394.6
  Top Layer w8: v1(4055,1280) 4055,1275.4 4070,1260.4 4070,1246.76 4091.73,1225.03 IC3.24
  Bottom Layer w8: v1(4055,1280) 4075,1300 K9.2 K9.2@4072.5,1562.5
NetIC3_25: IC3.25 K9.3 | length 468
  Top Layer w8: v1(3970,1200) 3973.25,1196.75 3973.25,1179.98 4009.97,1143.27 IC3.25
  Bottom Layer w8: v1(3970,1200) 3972.5,1202.5 3972.5,1562.5 K9.3
NetIC3_26: IC3.26 K9.4 | length 553.4
  Top Layer w8: v1(3880,1245) 3880,1205 3961.42,1123.58 IC3.26
  Bottom Layer w8: K9.4 3877.5,1562.5 3877.5,1247.5 v1(3880,1245)
NetIC3_27: IC3.27 K9.5 | length 661.5
  Top Layer w8: v1(3870,1115) 3874.6,1115 3885.7,1103.9 IC3.27
  Bottom Layer w8: K9.5 3775,1210 v1(3870,1115)
NetIC3_30: IC3.30 R10.1 | length 1014
  Top Layer w8: R10.1 3153.58,1074.58 3159,1080 v1(3386,1080) ; v1(3860,950) 3863.25,953.25 3873.25,953.25 3964.84,1044.84 IC3.30
  Bottom Layer w8: v1(3386,1080) 3416,1050 3760,1050 v1(3860,950)
NetIC3_31: IC3.31 K4.1 | length 704.2
  Top Layer w8: v1(3938,978) 3985.16,1025.16 IC3.31
  Bottom Layer w8: K4.1 3606,1310 v1@3937.73,978.27
NetIC3_32: IC3.32 K4.2 | length 706.8
  Top Layer w8: v1(3916,941) 3920.6,941 3928.35,933.25 3930.78,933.25 4002.63,1005.1 4037.21,1005.1 IC3.32
  Bottom Layer w8: K4.2 3672,1210 3916,966 v1(3916,941)
NetIC3_33: IC3.33 K4.3 | length 1149.5
  Top Layer w8: IC3.33 4114.21,985.79 v1(4140,960)
  Bottom Layer w8: K4.3 3372,1110 3364,1102 3364,1055 3397,1022 3560,1022 3676,906 4086,906 v1(4140,960)
NetIC3_34: IC3.34 K6.2 | length 630.5
  Top Layer w8: v1(3750,790) 3810,790 3986.1,966.1 IC3.34
  Bottom Layer w8: K6.2 v1(3750,790)
NetIC3_35: IC3.35 K6.3 | length 714.8
  Top Layer w8: v1(3750,720) 3856,720 3944,808 3944,895 3995.42,946.42 IC3.35
  Bottom Layer w8: K6.3 3720,690 v1(3750,720)
NetIC3_44: IC3.44 K10.1 | length 470.1
  Top Layer w8: IC3.44 4229.53,690.47 v1(4260,660)
  Bottom Layer w8: K10.1 4200,600 v1(4260,660)
NetIC3_45: IC3.45 K10.2 | length 698.2
  Top Layer w8: IC3.45 4249.21,819.98 4439,630.19 4439,412.47 4428,401.47 4338.53,401.47 K10.2
NetIC3_46: IC3.46 K12.1 R21.1 | length 1662.9
  Top Layer w8: R21.1 3826.42,550 v1(3890,550) ; v1(4240,990) 4268.9,961.1 IC3.46
  Bottom Layer w8: v1(3890,550) 4240,900 v1(4240,990) 4270,960 4270,897.7 4260,887.7 4260,830 4348,742 4862,742 K12.1
NetIC3_47: IC3.47 K12.2 R22.1 | length 1211.8
  Top Layer w8: R22.1 3997.87,546.42 4148.2,696.75 4156.75,696.75 v1(4160,700) ; IC3.47 4288.58,811.42 4330,770 v1(4450,770) v1(4450,700) ; K12.2@4799.79,790 K12.2
  Bottom Layer w8: v1(4160,700) v1(4450,700) ; v1(4450,770) 4617.02,770 4637.02,790 K12.2
NetIC3_48: IC3.48 K12.7 | length 911.7
  Top Layer w8: IC3.48 4308.27,829.73 4340,798 v1(4413,798)
  Bottom Layer w8: v1(4413,798) 4546,798 4680,932 4924,932 4949,957 4949,1051 K12.7
NetIRF9Z34NPBF_1: IRF9Z34NPBF.1 T2.3 T6.3 | length 664.8
  Top Layer w20: T2.3 1467,860.63 1487,880.63 T6.3 1540,878.66 1470.96,809.62 1470.96,780.96 v1(1470,780) ; IRF9Z34NPBF.1 1469.88,503.35 1469.88,609.88 v1(1470,610)
  Bottom Layer w20: v1(1470,610) v1(1470,780)
NetIRF9Z34NPBF_3: IRF9Z34NPBF.3 L2.1 | length 663.6
  Top Layer w40: v2(900,630) 905,635 L2.1 ; v2(1170,500) 1173.23,503.23 IRF9Z34NPBF.3
  Bottom Layer w40: v2(900,630) 1030,500 v2(1170,500)
NetK2_1: K2.1 RE1.24 | length 1594
  Top Layer w100: K2.1 140,1570 140,2151.42 198.58,2210 490,2210 620,2340 RE1.24
NetK2_2: K2.2 RE1.14 | length 707.5
  Top Layer w100: K2.2 310,1660 694.72,2044.72 RE1.14
NetK3_2: K3.2 R2.1 R4.2 R9.2 R13.2 | length 3927.8
  Top Layer w20: v1(2719,195) 2719.96,194.04 2766.29,194.04 2769.33,197.09 R4.2 ; v1(3122,505) 3122,217.42 3148,191.42 R9.2 3270,191.42 3271.42,190 R13.2 3438.58,190 3440,191.42 R2.1
  Bottom Layer w20: K3.2 545,195 v1(2719,195) 2719,380 2844,505 v1(3122,505)
NetK8_1: K8.1 L2.4 | length 993.7
  Top Layer w70: v2(710,1260) 713.86,1263.86 L2.4
  Bottom Layer w70: K8.1 560,780 710,930 v2(710,1260)
NetK8_2: K8.2 L2.3 | length 895.8
  Top Layer w70: 1000,1090 1005,1095 L2.3
  Top Layer w80: K8.2 940,1030 1000,1090
NetR1_1: R1.1 R5.2 U1.7 | length 1472.9
  Top Layer w20: v1(2270,880) 2269.04,880.96 2269.04,944.54 R1.1 2055.78,953.58 1973.34,1036.02 1973.34,1198.28 1985.06,1210 2080,1210 2200.47,1089.53 2442.68,1089.53 2445,1087.2 U1.7 ; R5.2 2417.63,744.04 2489.04,744.04 v1(2490,745)
  Bottom Layer w20: v1(2270,880) 2355,880 v1(2490,745)
NetR1_2: R1.2 R8.2 U1.6 | length 922.6
  Top Layer w20: v1(2202,1025) 2202.71,1025.71 2259.29,1025.71 R1.2 ; v1(2317,1139) 2318.35,1139 2342.83,1114.53 2450.27,1114.53 2452,1112.8 U1.6 ; R8.2 2621,737.42 2621,807.65 2623,809.65 v1(2623,811)
  Bottom Layer w20: v1(2202,1025) 2202.5,1025 2316.5,1139 v1(2317,1139) 2622.04,833.96 2622.04,811.96 v1(2623,811)
NetR7_2: R7.2 R10.2 T1.2 | length 1245.8
  Top Layer w20: v1(2815,1285) 2860,1285 ; v1(3220,970) 3220.96,970.96 3220.96,1034.54 R10.2
  Top Layer w40: T1.2 2812.6,1437.4 2860,1390 2860,1285 2860,1140 2889.33,1110.67 2949.33,1110.67 R7.2
  Bottom Layer w20: v1(2815,1285) 3130,970 v1(3220,970)
NetR11_1: R11.1 R14.2 U1.1 | length 2700.6
  Top Layer w20: U1.1 2707.03,1061.61 2718.65,1050 v1(2720,1050) ; v1(4029,1684) 4029,1844 4060,1875 R14.2 4145,2150.58 4166.42,2172 R11.1
  Bottom Layer w20: v1(2720,1050) 2560,1210 2560,1422 2663,1525 3160,1525 3319,1684 v1(4029,1684)
NetR11_2: R11.2 R12.1 | length 379.6
  Top Layer w20: R12.1 4021,1876.42 4093.58,1949 R11.2
NetR12_2: R12.2 R15.2 U1.2 | length 3633.6
  Top Layer w20: v1(2342,312) 2343.35,312 2372.59,282.76 2387.24,282.76 2403.58,266.42 R15.2 ; U1.2 2748.28,1087.2 2760,1075.49 2760,897 2690,827 v1(2689,827) ; v1(3944,1730) 3967,1753 3967,1803.58 R12.2
  Bottom Layer w20: v1(2342,312) 2507.05,477.05 2527.05,477.05 2691.14,641.14 2691.14,732.32 2689,734.47 v1(2689,827) 2510,1006 2510,1545 2574,1609 2846,1609 2967,1730 v1(3944,1730)
NetR17_1: R17.1 T2.2 T4.1 T6.2 | length 1051.7
  Top Layer w20: v1(1238,1024) 1238,1022.65 1252.6,1008.05 T2.2 ; v1(1470,1030) 1470.96,1029.04 1470.96,992.98 1502.6,961.34 T6.2 ; T4.1 1634.37,959 1601.37,926 1555,926 ; R17.1 1601,880 1555,926 ; T6.2 1521.63,959.37 1555,926 ; T6.2 1502.6,935 1511.6,926 1555,926
  Bottom Layer w20: v1(1238,1024) 1462.65,1024 1468.65,1030 v1(1470,1030)
VCC: B1.1 C1.2 IRF9Z34NPBF.2 R3.1 R17.2 T2.1 | length 5077.6
  Top Layer w20: v1(1360,1150) 1327.4,1117.4 T2.1 1327.4,919.4 1308,900 1268,900 1259,891 1259,824.16 1343.16,740 1662.84,740 R17.2 1730,361.72 1718.28,350 1481.22,350 1380,248.78 IRF9Z34NPBF.2 ; v1(1790,1780) B1.1 ; v1(3884,2190) 3885.35,2190 3891.31,2184.04 3958.79,2184.04 R3.1
  Top Layer w40: B1.1 1903.94,1780 1993.94,1870 2830,1870 C1.2
  Bottom Layer w20: v1(1360,1150) 1360,1600 1540,1780 v1(1790,1780) ; C1.2 v1(3884,2190)
pads on no net: IC3.4 IC3.5 IC3.6 IC3.7 IC3.8 IC3.9 IC3.12 IC3.13 IC3.18 IC3.19 IC3.36 IC3.37 IC3.38 IC3.39 IC3.40 IC3.41 K12.3 K12.4 RE1.12

## Silkscreen, mask and mechanical layers (free items; w line width, h text height)
Top Overlay:
  text "Thomas Fokkema" at 4080,2466 h60

## Text inside footprints (layer, text, board x,y; h text height)
B1: Top Overlay "+" at 1870,1674 h60; Top Overlay "-" at 1680,1685.01 h60; Top Overlay "~" at 1880,1436.02 h60; Top Overlay "~" at 1680,1443.02 h60
B2: Top Overlay "+" at 2347,1677 h60; Top Overlay "-" at 2140,1675.01 h60; Top Overlay "~" at 2340,1436.02 h60; Top Overlay "~" at 2142,1433.02 h60
K12: Top Overlay "2" at 4830,683 h50 r90; Top Overlay "1" at 4928,694 h50 r90; Top Overlay "9" at 4930,1258 h50 r90; Top Overlay "10" at 4828,1256 h50 r90